# EAGLE board main (EAGLE 9.5.2)
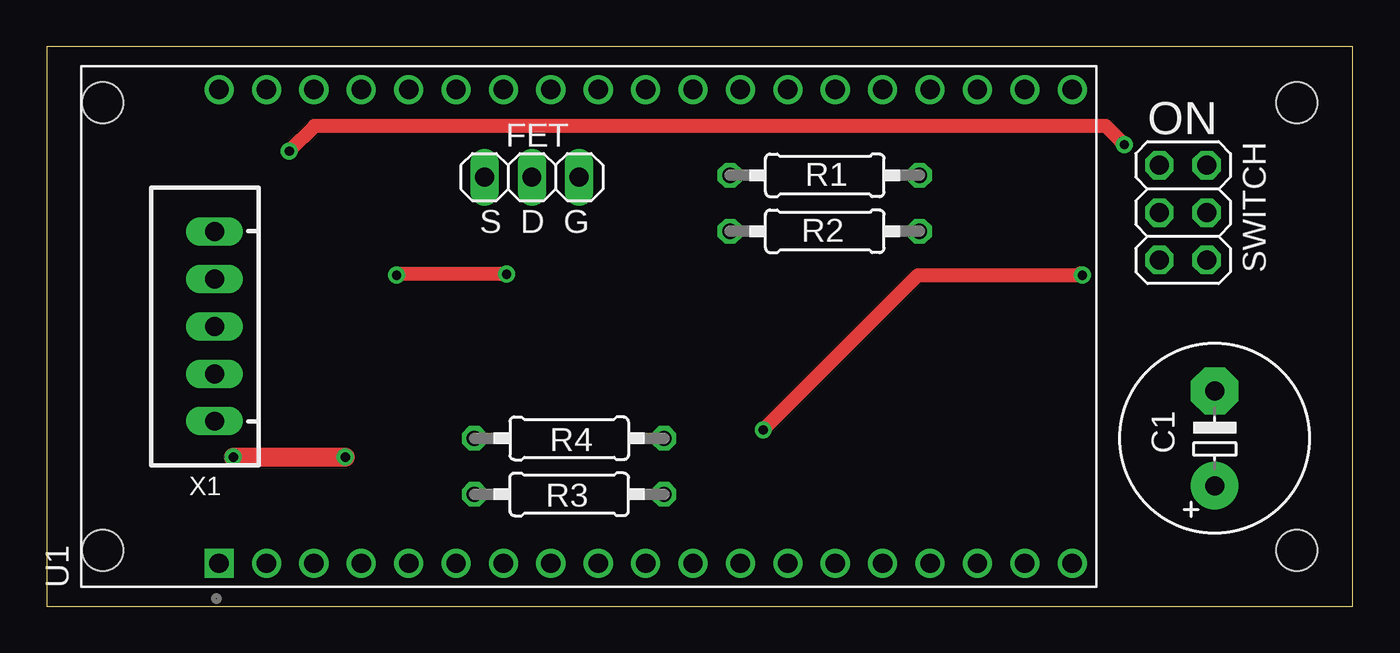
[diagram p0: board, top side]
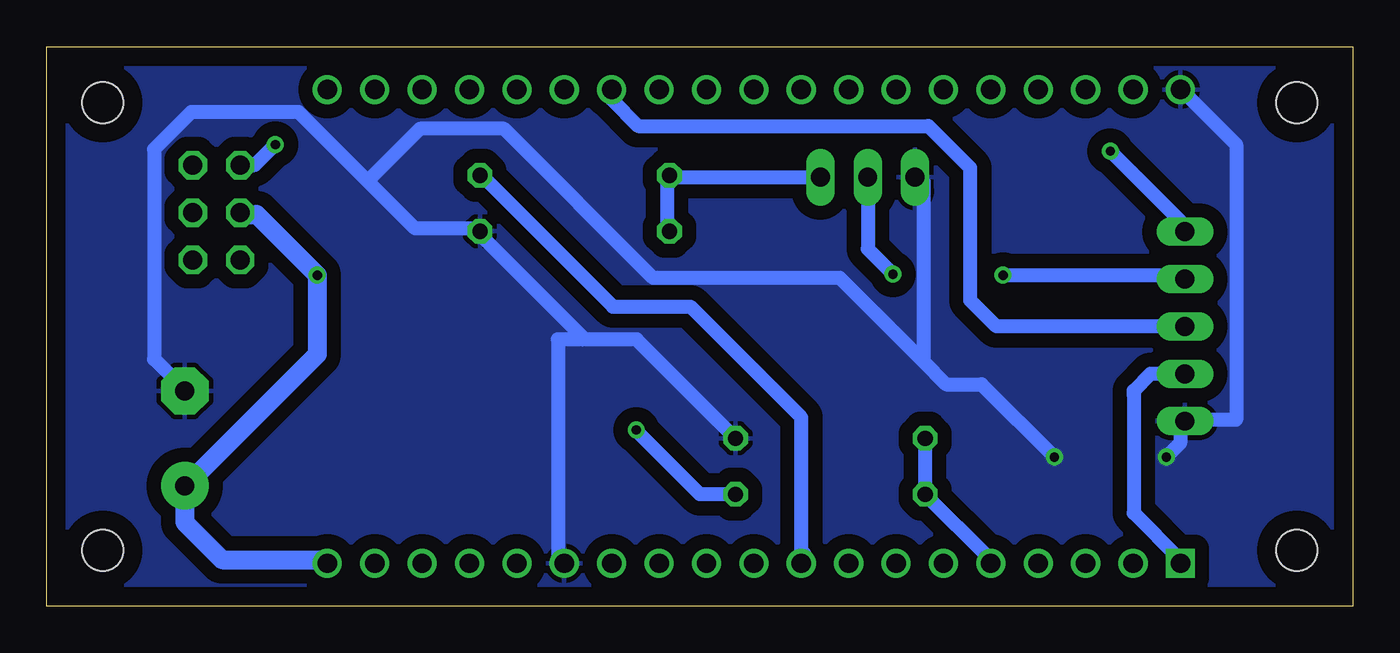
[diagram p1: board, bottom side, seen from below]

Size 70 x 30 mm. Coordinates in mm from the lower left corner, seen from the top.
Outline: 0,0 70,0 70,30 0,30 0,0
Copper layers (1*16): Top 0.035mm / dielectric 1.5mm / Bottom 0.035mm
Design rules "default": minimum track width 6mil, minimum drill 0.35mm, track to track 6mil, track to pad 6mil, pad to pad 6mil, via to via 6mil, smd to smd 6mil, copper to edge 40mil, drill to drill 6mil, minimum pad ring 10mil, minimum via ring 8mil, stop-mask expansion 4mil, vias tented up to drill 0mil, thermal gap 10mil
Net classes: 0 default: width 0.762 mm, clearance 0.762 mm; 1 wide: width 1.016 mm, clearance 1.016 mm
Holes 2.2 mm at 3,3 3,27 67,27 67,3
tRestrict: area 8,27 to 56,29; area 7,9 to 11,21; area 8,1 to 56,3; area 21.8,21.3 to 30.2,24.6; area 58.4,17.2 to 63.6,25; area 22.2,8.1 to 23.6,9.9; area 22.2,5 to 23.6,6.8; area 32.5,5 to 33.9,6.8; area 32.5,8.1 to 33.9,9.9; area 35.9,22.2 to 37.3,24; area 46,22.2 to 47.4,24; area 46.1,19.2 to 47.5,21; 3 more areas

## Footprints (pad centres in the part's own frame; a part is rotated, then mirrored left to right if it is on the bottom)
E5-10,5 = drill 1.016 pad 2.54: + -2.54,0 | drill 1.016 pad 2.54 octagon: - 2.54,0
1X03 = drill 1.016 long: 1 -2.54,0; 2 0,0; 3 2.54,0
0207/10 = drill 0.813 octagon: 1 -5.08,0; 2 5.08,0
2X03 = drill 1.016 octagon: 1 -2.54,-1.27; 2 -2.54,1.27; 3 0,-1.27; 4 0,1.27; 5 2.54,-1.27; 6 2.54,1.27
MODULE_ESP32-DEVKITC-32D = drill 1.04 square: 1 -12.7,19.76 | drill 1.04: 2 -12.7,17.22; 3 -12.7,14.68; 4 -12.7,12.14; 5 -12.7,9.6; 6 -12.7,7.06; 7 -12.7,4.52; 8 -12.7,1.98; 9 -12.7,-0.56; 10 -12.7,-3.1; 11 -12.7,-5.64; 12 -12.7,-8.18; 13 -12.7,-10.72; 14 -12.7,-13.26; 15 -12.7,-15.8; 16 -12.7,-18.34; 17 -12.7,-20.88; 18 -12.7,-23.42; 19 -12.7,-25.96; 20 12.7,19.76; 21 12.7,17.22; 22 12.7,14.68; 23 12.7,12.14; 24 12.7,9.6; 25 12.7,7.06; 26 12.7,4.52; 27 12.7,1.98; 28 12.7,-0.56; 29 12.7,-3.1; 30 12.7,-5.64; 31 12.7,-8.18; 32 12.7,-10.72; 33 12.7,-13.26; 34 12.7,-15.8; 35 12.7,-18.34; 36 12.7,-20.88; 37 12.7,-23.42; 38 12.7,-25.96
JST-XH-05-PACKAGE-LONG-PAD = drill 1.016 long: 1 -5.08,0; 2 -2.54,0; 3 0,0; 4 2.54,0; 5 5.08,0

## Placement (x,y rotation side)
C1  [E5-10,5]  62.6,9 90 top
FET  PINHD-1X3  [1X03]  26,23 0 top
R1  10Ω  [0207/10]  41.7,23.1 0 top
R2  20kΩ  [0207/10]  41.7,20.1 0 top
R3  20kΩ  [0207/10]  28,6 0 top
R4  20kΩ  [0207/10]  28,9 180 top
SWITCH  PINHD-2X3  [2X03]  60.9,21.1 270 top
U1  ESP32-DEVKITC-32D  [MODULE_ESP32-DEVKITC-32D]  29,15 90 top
X1  JST-XH-05-PIN-LONG-PAD  [JST-XH-05-PACKAGE-LONG-PAD]  9,15 90 top

## Library data of the parts
C1 = rcl; SPICEPREFIX: C
FET SWITCH = Connector; CATEGORY: CONNECTOR; SUB-CATEGORY: PIN-HEADER
R1-R4 = resistor
U1 = ESP32-DEVKITC-32D; MANUFACTURER: Espressif Systems; PARTREV: 4
X1 = Rembrandt Electronics - JST XH Connectors v1-0

## Nets
+3V3: U1.1 X1.2
+5V [wide]: C1.+ R3.2 SWITCH.3 U1.19
GND: C1.- FET.1 R2.2 R4.1 U1.14 U1.20 X1.1
GND2: U1.26
HALL_SIGNAL: U1.32 X1.3
MOTOR_MINUS: FET.2 X1.4
MOTOR_PLUS: SWITCH.1 X1.5
N$2: FET.3 R1.1 R2.1
N$3: R1.2 U1.9
V_CHECK: R3.1 R4.2 U1.5

## Tracks (layer width: path | path; a pad name or v marks a point on that pad's centre or on a via)
+3V3
  Bottom 0.762: U1.1 9.25,2.5 11.75,5 11.75,11.35 11.75,11.55 10.84,12.46 X1.2
+5V  (via drill 0.5)
  Top 0.762: 55.4,17.85 v55.5,17.75 46.7,17.75 v38.4,9.45 38.4,9.35
  Bottom 0.762: v38.4,9.45 38.4,9.4 35,6 R3.2
  Bottom 1.016: U1.19 55,2.5 60.6,2.5 62.6,4.5 C1.+ | 62.5,6.25 C1.+ | SWITCH.3 59.5,21 58.75,21 v55.5,17.75 55.5,13.5 62.25,6.75 C1.+
GND  (via drill 0.5)
  Top 1.016: v10,8 v16,8
  Bottom 0.762: 23,13.1 23,22.75 23.25,23 FET.1 | U1.20 9,27.5 6.25,24.75 6.25,10 9,10 X1.1 9.25,9.75 9.25,8.75 v10,8 | U1.14 42.6,2.58 42.6,14.3 41.3,14.3 41.25,14.3 | 52.8,22.8 50.25,20.25 47,20.25 R2.2 46.71,19.86 41.2,14.35 41.25,14.3 | 52.8,22.8 56.5,26.5 62.25,26.5 64.25,24.5 64.25,13.25 62.75,11.75 C1.- | 23,13.1 21.8,11.9 19.9,11.9 v16,8 | 23,13.1 27.5,17.6 37.5,17.6 45.5,25.6 50,25.6 52.8,22.8 | R4.1 38.38,14.3 41.25,14.3
  pour Bottom: 0.2,29.8 0.2,0 70.1,0 70.1,29.8
HALL_SIGNAL
  Bottom 0.762: X1.3 19.1,15 20.5,16.4 20.5,23.5 22.75,25.75 38.3,25.75 39.72,27.17 U1.32
MOTOR_MINUS  (via drill 0.5)
  Top 0.762: v18.75,17.75 18.8,17.8 v24.65,17.8
  Bottom 0.762: v18.75,17.75 9,17.75 X1.4 | v24.65,17.8 26,19.15 FET.2
MOTOR_PLUS  (via drill 0.5)
  Top 0.762: v57.75,24.75 56.75,25.75 14.35,25.75 v13,24.4
  Bottom 0.762: v57.75,24.75 58.85,23.65 59.62,23.65 SWITCH.1 | 9,20.25 X1.5 9,20.4 v13,24.4
N$2
  Bottom 0.762: R2.1 36.75,20.25 36.75,23 R1.1 36.25,23 FET.3
N$3
  Bottom 0.762: R1.2 46.7,23.1 39.66,16.06 35.5,16.06 29.56,10.12 U1.9 29.4,2.83
V_CHECK
  Bottom 0.762: U1.5 19.4,2.5 19.52,2.62 19.52,2.6 R3.1 | R3.1 | R4.2 R3.1

## Text on the board
tNames: ON | S D G